# Altium PCB BMS_Slavee.PcbDoc (part 4 of 4)
Units mm, origin at the board's own origin, x right, y up, seen from the top; angles counter-clockwise.
Board outline 197.87 x 123.44 mm, 2 copper layers (Top Layer, Bottom Layer); 344 components, 178 nets, 953 pads, 755 vias.
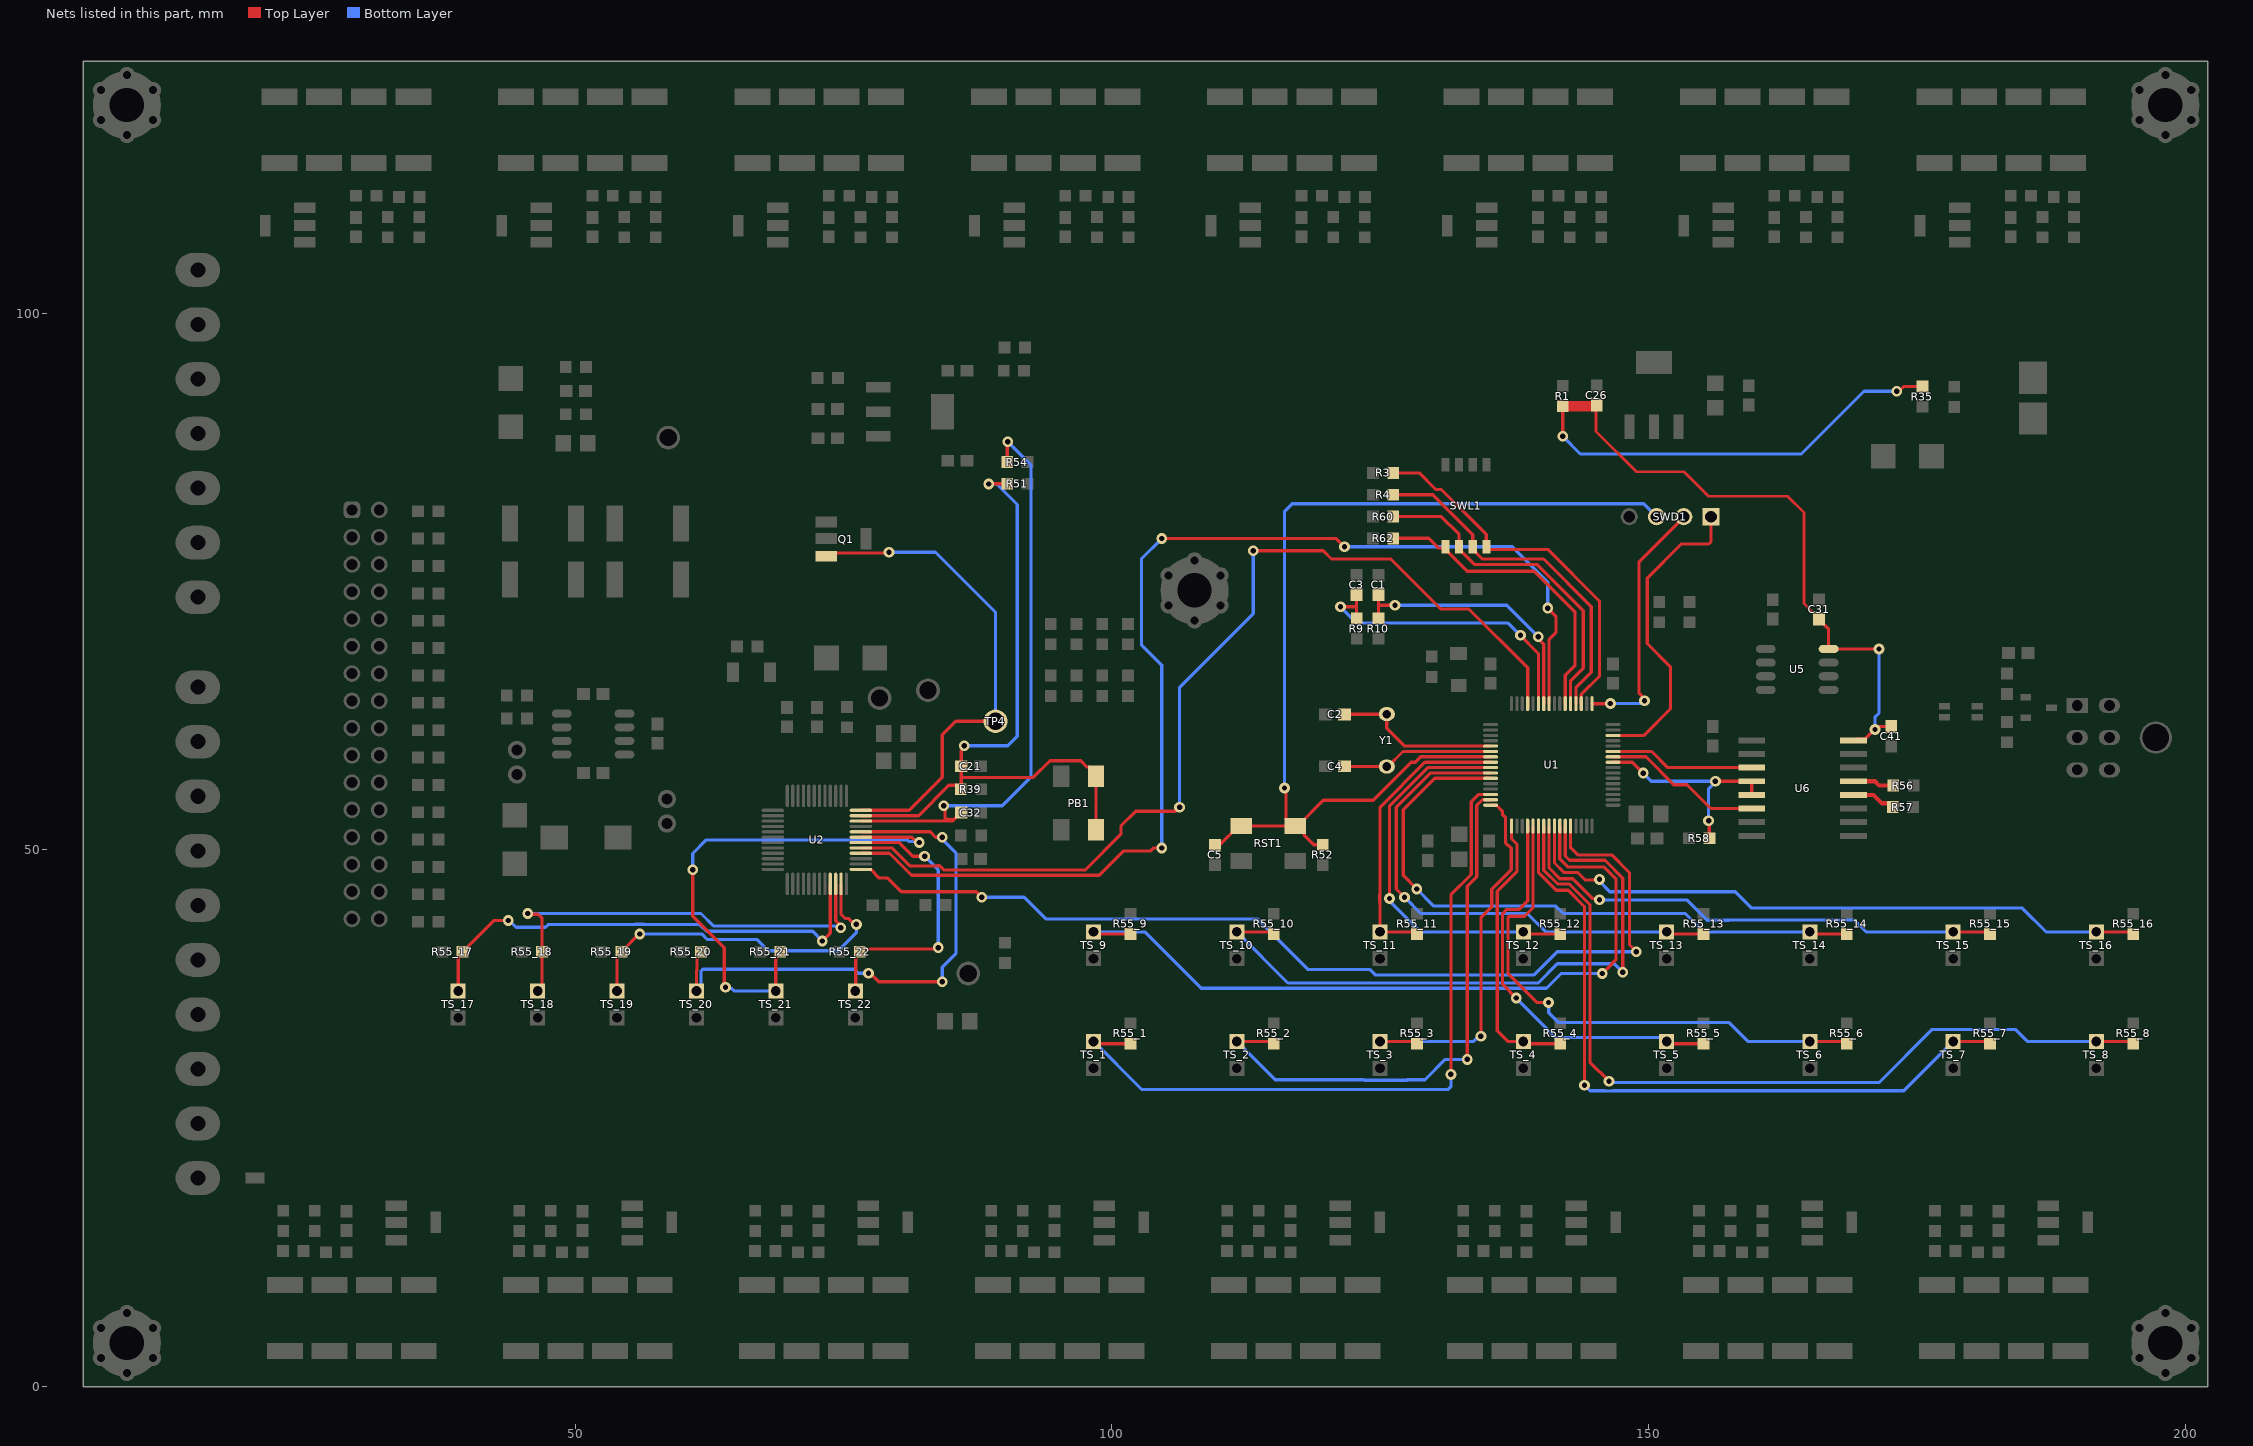
[diagram p4: the nets of this part, all layers, seen from the top]

## Via types
v1: diameter 1, hole 0.5, Top Layer to Bottom Layer, tented both sides, 697 vias
v2: diameter 2, hole 1, Top Layer to Bottom Layer, tented both sides, 58 vias

## Nets (pads, with @x,y where several pads share a name; then routed paths per layer and width w, separated by ;. In a path a pad name is that pad's centre, name@x,y a point inside that pad or via, vN(x,y) a via of type N, cw(c..) or ccw(c..) an arc to the next point about the centre after c; other vN are vias at no path point) (continued)
NetU1_28: U1.28 U2.25 | length 93.4
  Top Layer w0.3: U2.25@76.617,48.177 77.517,48.177 78.323,47.371 79.121,47.371 80.391,46.101 87.358,46.101 87.866,45.593 v1(87.884,45.593) ; U1.28@142.72,52.324 142.72,50.193 143.383,49.53 146.558,49.53 148.209,47.879 148.209,41.148 v1(148.844,40.513)
  Bottom Layer w0.3: v1(87.884,45.593) 91.821,45.593 93.853,43.561 113.538,43.561 118.237,38.862 124,38.862 124.508,38.354 139.319,38.354 141.478,40.513 v1(148.844,40.513)
NetU1_57: U1.57 U2.28 | length 109.9
  Top Layer w0.3: U2.28@76.617,49.677 79.283,49.677 81.327,47.633 98.829,47.633 101.092,49.896 101.204,49.896 103.609,49.896 103.893,50.18 104.633,50.18 v1(104.648,50.165) ; v1(104.648,78.994) 120.904,78.994 v1(121.666,78.232) ; v1(140.589,72.517) 141.351,71.755 141.351,70.231 140.72,69.6 U1.57@140.72,63.612
  Bottom Layer w0.3: v1(104.648,50.165) 104.648,67.183 102.743,69.088 102.743,77.089 v1(104.648,78.994) ; v1(121.666,78.232) 137.287,78.232 140.589,74.93 v1(140.589,72.517)
NetU1_61: U1.61 U2.29 | length 93.8
  Top Layer w0.3: U2.29@76.617,50.177 79.49,50.177 81.168,48.499 83.678,48.499 83.696,48.517 83.944,48.517 84.328,48.133 97.536,48.133 100.838,51.435 100.838,52.22 102.217,53.6 105.924,53.6 v1(106.299,53.975) ; v1(113.157,77.851) 119.688,77.851 120.45,77.089 125.984,77.089 130.647,72.426 133.259,72.426 138.72,66.965 U1.61@138.72,63.373
  Bottom Layer w0.3: v1(106.299,53.975) 106.299,65.151 113.157,72.009 v1(113.157,77.851)
NRST: C5.1 R52.1 RST1.1 SWD1.3 U1.7 | length 97.1
  Top Layer w0.3: C5.1@109.564,50.189 C5.1@109.855,50.48 ; C5.1@110.013,50.43 111.804,52.221 RST1.1@112.054,52.221 116.804,52.221 116.204,52.821 116.204,55.627 v1(116.078,55.753) ; RST1.1@117.054,52.221 RST1.1@117.304,52.221 ; R52.1@119.634,50.48 118.795,50.48 117.904,51.371 117.904,51.621 RST1.1@117.304,52.221 ; U1.7@135.27,58.662 128.766,58.662 128.27,58.166 127.889,58.166 124.333,54.61 119.693,54.61 RST1.1@117.304,52.221
  Bottom Layer w0.3: v1(116.078,55.753) 116.078,81.534 116.777,82.233 149.519,82.233 SWD1.3@150.723,81.029
PH0-OSC_IN: C2.2 U1.5 Y1.1 | length 15.7
  Top Layer w0.3: C2.2@121.677,62.992 122.031,62.638 Y1.1@125.603,62.638 125.603,61.341 127.282,59.662 U1.5@135.27,59.662
PH1-OSC_OUT: C4.2 U1.6 Y1.2 | length 14.2
  Top Layer w0.3: C4.2@121.677,57.785 121.704,57.758 Y1.2@125.603,57.758 125.703,57.758 127.107,59.162 U1.6@135.27,59.162
REG1: C21.1 PB1.2 R39.2 R51.2 U2.35 | length 65.8
  Top Layer w0.3: U2.35@76.617,53.177 81.989,53.177 84.819,56.007 85.562,56.007 R39.2@85.918,55.651 85.968,55.701 85.968,56.743 ; v1(86.233,59.69) 86.233,59.501 85.968,59.236 C21.1@85.968,57.785 85.968,56.743 ; v1(88.519,84.074) 88.646,84.074 88.664,84.092 R51.2@90.246,84.092 ; PB1.2@98.528,51.856 PB1.2@98.528,56.856 98.528,57.106 97.928,57.706 97.678,57.706 97.091,58.293 94.234,58.293 92.684,56.743 85.968,56.743
  Bottom Layer w0.3: v1(86.233,59.69) 90.297,59.69 91.186,60.579 91.186,82.169 89.281,84.074 v1(88.519,84.074)
REG2: C32.1 R54.2 U2.34 | length 55.1
  Top Layer w0.3: U2.34@76.617,52.677 85.128,52.677 C32.1@85.918,53.467 ; v1(84.328,54.102) 84.455,53.975 84.455,52.839 84.707,52.839 84.709,52.837 85.288,52.837 ; R54.2@90.246,86.124 90.246,87.96 v1(90.297,88.011)
  Bottom Layer w0.3: v1(84.328,54.102) 89.789,54.102 92.456,56.769 92.456,85.852 v1(90.297,88.011)
REGIN: Q1.3 TP4.1 U2.36 | length 46.7
  Top Layer w0.3: Q1.3@73.409,77.334 73.719,77.644 79.161,77.644 v1(79.24,77.723) ; U2.36@76.617,53.677 81.109,53.677 84.201,56.769 84.201,60.706 85.471,61.976 TP4.1@89.154,61.976 ; v1@79.24,77.644 v1@79.248,77.644
  Bottom Layer w0.3: v1(79.24,77.723) v1(79.24,77.723) 83.566,77.724 89.154,72.136 TP4.1@89.154,61.976
RS_TR_EN: R58.1 U1.41 U6.4 U6.5 | length 19.9
  Top Layer w0.3: U1.41@146.67,58.162 148.467,58.162 v1(149.479,57.15) ; v1(155.575,52.705) 155.646,52.634 R58.1@155.646,51.072 ; v1(156.21,56.388) U6.4@158.969,56.388 ; U6.5@159.604,55.118 U6.4@159.604,56.388
  Bottom Layer w0.3: v1(149.479,57.15) 150.241,56.388 v1(156.21,56.388) 156.21,56.315 155.575,55.68 v1(155.575,52.705)
RSIN_N: R56.1 U6.13 | length 3.9
  Top Layer w0.381: U6.13@169.072,56.388 171.069,56.388 171.468,55.989 R56.1@172.776,55.989
RSIN_P: R57.2 U6.12 | length 4.1
  Top Layer w0.381: U6.12@169.072,55.118 170.942,55.118 171.725,54.335 172.36,54.335 R57.2@172.72,53.975
SCL: C1.1 R10.1 U1.58 | length 24.8
  Top Layer w0.3: R10.1@124.816,71.562 124.841,71.587 124.841,72.682 ; C1.1@124.841,73.776 124.841,72.682 ; v1(126.365,72.771) 124.93,72.771 124.841,72.682 ; v1(139.7,69.85) 139.7,69.661 140.22,69.141 U1.58@140.22,63.612
  Bottom Layer w0.3: v1(126.365,72.771) 136.779,72.771 v1(139.7,69.85)
SDA: C3.1 R9.1 U1.59 | length 28.7
  Top Layer w0.3: v1(121.285,72.644) 122.746,72.644 122.784,72.682 ; C3.1@122.784,73.776 122.784,72.682 ; R9.1@122.809,71.562 122.784,71.587 122.784,72.682 ; v1(138.049,69.977) 138.793,69.233 138.793,69.218 139.72,68.29 U1.59@139.72,63.612
  Bottom Layer w0.3: v1(121.285,72.644) 122.806,71.123 136.903,71.123 v1(138.049,69.977)
SW1: R62.1 SWL1.5 U1.54 | length 28.8
  Top Layer w0.3: R62.1@126.207,79.012 129.522,79.012 130.429,78.105 SWL1.5@130.937,78.105 ; SWL1.5@131.064,78.232 131.064,78.105 131.064,77.978 133.096,75.946 139.319,75.946 143.137,72.128 143.137,67.191 142.22,66.274 U1.54@142.22,63.612
SW2: R60.1 SWL1.6 U1.53 | length 31.6
  Top Layer w0.3: R60.1@125.928,81.044 130.665,81.044 132.334,79.375 SWL1.6@132.334,78.232 132.334,77.978 133.731,76.581 139.573,76.581 143.891,72.263 143.891,66.929 142.72,65.758 U1.53@142.72,63.612
SW3: R4.1 SWL1.7 U1.52 | length 33.5
  Top Layer w0.3: R4.1@125.928,83.076 129.894,83.076 133.604,79.366 SWL1.7@133.604,78.232 133.604,77.978 134.493,77.089 140.208,77.089 144.653,72.644 144.653,66.548 143.22,65.115 U1.52@143.22,63.612
SW4: R3.1 SWL1.8 U1.51 | length 35.4
  Top Layer w0.3: R3.1@125.928,85.108 128.633,85.108 130.175,83.566 130.683,83.566 134.874,79.375 134.874,78.209 135.105,77.978 140.589,77.978 145.415,73.152 145.415,66.167 143.72,64.472 U1.51@143.72,63.612
SWCLK: SWD1.2 U1.49 | length 24.1
  Top Layer w0.3: U1.49@144.72,63.612 146.416,63.612 v1(146.431,63.627) ; v1(149.606,63.881) 149.606,64.07 149.098,64.578 149.098,76.835 SWD1.2@153.289,81.026
  Bottom Layer w0.3: v1(146.431,63.627) 149.352,63.627 v1(149.606,63.881)
SWDIO: SWD1.1 U1.46 | length 29.1
  Top Layer w0.3: U1.46@146.67,60.662 149.562,60.662 152.019,63.119 152.019,67.056 149.86,69.215 149.86,75.311 153.035,78.486 155.575,78.486 155.803,78.714 SWD1.1@155.803,81.029
TS_1: R55_1.1 TS_1.1 U1.14 | length 68.2
  Top Layer w0.3: TS_1.1@98.287,32.151 98.495,31.943 R55_1.1@101.727,31.943 ; v1(131.572,29.083) 131.572,45.801 133.477,47.706 133.477,54.483 134.156,55.162 U1.14@135.27,55.162
  Bottom Layer w0.3: TS_1.1@98.287,32.151 102.752,27.686 102.989,27.686 103.004,27.671 103.752,27.671 103.767,27.686 131.318,27.686 131.572,27.94 v1(131.572,29.083)
TS_2: R55_2.1 TS_2.1 U1.15 | length 52.8
  Top Layer w0.3: TS_2.1@111.631,32.151 114.863,32.151 R55_2.1@115.071,31.943 ; v1(133.096,30.48) 133.096,46.617 133.985,47.506 133.985,54.134 134.513,54.662 U1.15@135.27,54.662
  Bottom Layer w0.3: TS_2.1@111.631,32.151 115.207,28.575 123.486,28.575 123.514,28.547 127.48,28.547 127.508,28.575 129.159,28.575 131.064,30.48 v1(133.096,30.48)
TS_3: R55_3.1 TS_3.1 U1.16 | length 37.2
  Top Layer w0.3: TS_3.1@124.975,32.151 128.207,32.151 R55_3.1@128.415,31.943 R55_3.1@128.608,31.75 ; v1(134.366,32.639) 134.366,43.688 135.382,44.704 135.382,46.347 137.187,48.152 137.187,50.138 136.652,50.673 136.652,53.03 136.37,53.312 136.37,53.612 135.82,54.162 U1.16@135.27,54.162
  Bottom Layer w0.3: TS_3.1@124.975,32.151 133.689,32.151 134.177,32.639 v1(134.366,32.639)
TS_4: R55_4.1 TS_4.1 U1.17 | length 26.4
  Top Layer w0.3: U1.17@137.22,52.212 137.22,51.046 137.72,50.546 137.72,47.977 135.897,46.154 135.897,44.656 135.882,44.641 135.882,33.155 136.886,32.151 TS_4.1@138.319,32.151 138.527,31.943 R55_4.1@141.759,31.943
TS_5: R55_5.1 TS_5.1 U1.20 | length 37.4
  Top Layer w0.3: v1(137.668,36.195) 136.382,37.481 136.382,44.053 136.779,44.45 137.922,44.45 138.72,45.248 U1.20@138.72,52.212 ; TS_5.1@151.662,32.151 151.87,31.943 R55_5.1@155.103,31.943
  Bottom Layer w0.3: v1(137.668,36.195) 141.351,32.512 151.301,32.512 TS_5.1@151.662,32.151
TS_6: R55_6.1 TS_6.1 U1.21 | length 50.3
  Top Layer w0.3: U1.21@139.22,52.212 139.22,44.605 138.43,43.815 137.033,43.815 136.882,43.664 136.882,38.505 139.612,35.775 v1(140.666,35.775) ; TS_6.1@165.006,32.151 168.238,32.151 R55_6.1@168.447,31.943
  Bottom Layer w0.3: v1(140.666,35.775) 140.689,35.752 140.689,34.825 141.605,33.909 157.48,33.909 159.238,32.151 TS_6.1@165.006,32.151
TS_7: R55_7.1 TS_7.1 U1.22 | length 66.6
  Top Layer w0.3: U1.22@139.72,52.212 139.72,47.897 141.389,46.228 142.494,46.228 144.018,44.704 v1(144.018,28.067) ; TS_7.1@178.35,32.151 181.582,32.151 R55_7.1@181.79,31.943
  Bottom Layer w0.3: v1(144.018,28.067) 144.526,27.559 145.915,27.559 145.93,27.544 146.678,27.544 146.693,27.559 173.758,27.559 TS_7.1@178.35,32.151
TS_8: R55_8.1 TS_8.1 U1.23 | length 78.4
  Top Layer w0.3: U1.23@140.22,52.212 140.22,48.104 141.507,46.816 142.613,46.816 144.518,44.911 144.518,30.234 v1(146.304,28.448) ; TS_8.1@191.694,32.151 194.926,32.151 R55_8.1@195.134,31.943
  Bottom Layer w0.3: v1(146.304,28.448) 146.431,28.321 171.45,28.321 176.403,33.274 182.872,33.274 182.887,33.259 183.635,33.259 183.65,33.274 184.15,33.274 185.273,32.151 TS_8.1@191.694,32.151
TS_9: R55_9.1 TS_9.1 U1.26 | length 72
  Top Layer w0.3: TS_9.1@98.287,42.359 98.495,42.151 R55_9.1@101.727,42.151 ; U1.26@141.72,52.212 141.72,49.161 142.486,48.395 145.843,48.395 146.939,47.299 146.939,39.759 146.41,39.231 146.41,39.222 v1(145.669,38.481)
  Bottom Layer w0.3: TS_9.1@98.287,42.359 103.056,42.359 108.316,37.099 140.477,37.099 141.859,38.481 v1(145.669,38.481)
TS_10: R55_10.1 TS_10.1 U1.27 | length 60.3
  Top Layer w0.3: TS_10.1@111.631,42.359 114.863,42.359 R55_10.1@115.071,42.151 ; U1.27@142.22,52.212 142.22,49.423 142.621,49.022 145.923,49.022 147.574,47.371 v1(147.574,38.608)
  Bottom Layer w0.3: TS_10.1@111.631,42.359 116.391,37.599 139.707,37.599 141.493,39.385 146.797,39.385 v1(147.574,38.608)
TS_11: R55_11.1 TS_11.1 U1.8 | length 27.2
  Top Layer w0.3: R55_11.1@128.415,42.151 128.207,42.359 TS_11.1@124.975,42.359 124.975,45.07 124.953,45.092 124.953,45.84 124.975,45.862 124.975,53.982 129.155,58.162 U1.8@135.27,58.162
TS_12: R55_12.1 TS_12.1 U1.9 | length 36.9
  Top Layer w0.3: v1(125.857,45.466) 125.857,54.102 129.417,57.662 U1.9@135.27,57.662 ; TS_12.1@138.319,42.359 138.527,42.151 R55_12.1@141.759,42.151
  Bottom Layer w0.3: v1(125.857,45.466) 125.857,45.212 128.71,42.359 TS_12.1@138.319,42.359
TS_13: R55_13.1 TS_13.1 U1.10 | length 48.1
  Top Layer w0.3: v1(127.254,45.593) 126.492,46.355 126.492,53.975 129.679,57.162 U1.10@135.27,57.162 ; TS_13.1@151.662,42.359 151.87,42.151 R55_13.1@155.103,42.151
  Bottom Layer w0.3: v1(127.254,45.593) 128.778,44.069 138.684,44.069 140.394,42.359 TS_13.1@151.662,42.359
TS_14: R55_14.1 TS_14.1 U1.11 | length 59
  Top Layer w0.3: v1(128.397,46.355) 127.127,47.625 127.127,53.721 130.068,56.662 U1.11@135.27,56.662 ; TS_14.1@165.006,42.359 165.214,42.151 R55_14.1@168.447,42.151
  Bottom Layer w0.3: v1(128.397,46.355) 129.99,44.762 141.357,44.762 142.049,44.069 153.416,44.069 155.126,42.359 TS_14.1@165.006,42.359
TS_15: R55_15.1 TS_15.1 U1.24 | length 47.5
  Top Layer w0.3: U1.24@140.72,52.212 140.72,48.311 141.715,47.316 142.93,47.316 144.789,45.457 145.297,45.457 v1(145.415,45.339) ; TS_15.1@178.35,42.359 181.582,42.359 R55_15.1@181.79,42.151
  Bottom Layer w0.3: v1(145.415,45.339) 153.543,45.339 155.448,43.434 157.48,43.434 157.509,43.463 169.135,43.463 170.239,42.359 TS_15.1@178.35,42.359
TS_16: R55_16.1 TS_16.1 U1.25 | length 60.2
  Top Layer w0.3: U1.25@141.22,52.212 141.22,48.772 142.097,47.895 143.367,47.895 144.061,47.201 145.372,47.201 v1(145.415,47.244) ; TS_16.1@191.694,42.359 194.926,42.359 R55_16.1@195.134,42.151
  Bottom Layer w0.3: v1(145.415,47.244) 145.415,47.063 146.377,46.101 158.051,46.101 159.575,44.577 184.785,44.577 187.003,42.359 TS_16.1@191.694,42.359
TS_17: R55_17.1 TS_17.1 U2.21 | length 45.2
  Top Layer w0.3: TS_17.1@39.105,36.85 39.105,40.098 42.42,43.413 v1(43.777,43.413) ; v1(73.025,41.505) 73.767,42.247 U2.21@73.767,46.827
  Bottom Layer w0.3: v1(43.777,43.413) 43.862,43.413 44.491,42.784 47.237,42.784 47.491,43.038 55.603,43.038 55.633,43.068 56.381,43.068 56.411,43.038 61.61,43.038 62.238,42.41 72.12,42.41 v1(73.025,41.505)
TS_18: R55_18.1 TS_18.1 U2.22 | length 42.4
  Top Layer w0.3: v1(45.593,44.069) 45.654,44.008 46.543,44.008 46.918,43.633 R55_18.1@46.918,40.513 46.918,37.265 TS_18.1@46.502,36.85 ; U2.22@74.267,46.827 74.267,43.389 74.735,42.921 v1(74.735,42.731)
  Bottom Layer w0.3: v1(45.593,44.069) 61.722,44.069 62.881,42.91 74.21,42.91 74.254,42.865 74.601,42.865 v1(74.735,42.731)
TS_19: R55_19.1 TS_19.1 U2.23 | length 33.2
  Top Layer w0.3: TS_19.1@53.9,36.85 53.9,40.098 R55_19.1@54.315,40.513 55.966,42.164 v1(56.007,42.164) ; U2.23@74.767,46.827 74.767,43.978 75.134,43.611 75.452,43.611 76.011,43.053 v1(76.2,43.053)
  Bottom Layer w0.3: v1(56.007,42.164) 61.777,42.164 62.285,41.656 66.929,41.656 67.984,40.601 74.51,40.601 76.2,42.291 v1(76.2,43.053)
TS_20: R55_20.1 TS_20.1 U2.32 | length 51.2
  Top Layer w0.3: TS_20.1@61.298,36.85 61.298,38.733 61.345,38.78 61.345,40.146 R55_20.1@61.713,40.513 ; U2.32@76.617,51.677 83.07,51.677 83.566,51.181 v1(84.201,51.181) ; v1(77.328,38.501) 77.493,38.501 78.275,37.719 v1(84.201,37.719)
  Bottom Layer w0.3: TS_20.1@61.298,36.85 61.722,37.274 61.722,38.701 61.898,38.877 75.994,38.877 76.37,38.501 v1(77.328,38.501) ; v1(84.201,37.719) 84.201,39.069 85.471,40.339 85.471,49.722 84.201,50.992 v1(84.201,51.181)
TS_21: R55_21.1 TS_21.1 U2.31 | length 49.7
  Top Layer w0.3: v1(60.96,48.133) 60.96,43.815 63.881,40.894 63.881,37.338 v1(64.008,37.211) ; TS_21.1@68.695,36.85 68.695,40.098 R55_21.1@69.11,40.513 ; U2.31@76.617,51.177 81.362,51.177 81.851,50.688 v1(82.041,50.688)
  Bottom Layer w0.3: v1(60.96,48.133) 60.96,49.657 62.23,50.927 80.941,50.927 81.091,50.777 81.952,50.777 v1(82.041,50.688) ; v1(64.008,37.211) 64.142,37.077 64.585,37.077 64.812,36.85 TS_21.1@68.695,36.85
TS_22: R55_22.1 TS_22.1 U2.30 | length 26.9
  Top Layer w0.3: TS_22.1@76.093,36.85 76.135,36.892 76.135,40.14 76.747,40.752 83.294,40.752 83.302,40.76 83.686,40.76 v1(83.82,40.894) ; U2.30@76.617,50.677 80.187,50.677 81.461,49.403 v1(82.55,49.403)
  Bottom Layer w0.3: v1@82.405,49.403 v1(82.55,49.403) 83.82,48.133 v1(83.82,40.894)
USART1_RX: U1.43 U6.3 | length 13.6
  Top Layer w0.3: U1.43@146.67,59.162 150.261,59.162 151.765,57.658 U6.3@159.604,57.658
USART1_TX: U1.42 U6.6 | length 14.9
  Top Layer w0.3: U1.42@146.67,58.662 149.745,58.662 152.336,56.071 153.564,56.071 155.786,53.848 U6.6@159.604,53.848
VCC-CAN: C26.2 C31.2 C41.2 R1.2 R35.1 U5.8 U6.16 | length 97.6
  Top Layer w0.254: C26.2@145.095,91.313 145.095,88.966 148.844,85.217 153.289,85.217 155.575,82.931 162.941,82.931 164.465,81.407 164.465,72.937 165.862,71.54 C31.2@165.862,71.49 ; v1(173.101,92.71) 173.303,92.71 173.755,93.162 R35.1@175.496,93.162
  Top Layer w0.3: v1(141.986,88.519) R1.2@141.986,91.313 ; C31.2@165.862,71.44 166.751,70.551 166.751,68.711 U5.8@166.755,68.707 v1(171.45,68.707) ; U6.16@169.072,60.198 169.289,60.198 169.418,60.327 170.164,60.327 171.322,61.485 C41.2@172.593,61.485
  Top Layer w1: R1.2@141.986,91.313 C26.2@145.095,91.313
  Bottom Layer w0.3: v1(141.986,88.519) 143.637,86.868 164.211,86.868 170.053,92.71 v1(173.101,92.71) ; v1(171.069,61.214) 171.069,62.357 171.45,62.738 v1(171.45,68.707)
pads on no net: H1.0 J1.0 U1.30 U1.33 U1.34 U1.35 U1.36 U1.37 U1.38 U1.39 U1.40 U1.50 U2.19 U2.38 U2.39 U2.40 U2.43 U2.44 U2.45 U3.4 U4.4 U6.11 U6.14

## Polygon pours and split planes (outlines as drawn)
GND on Bottom Layer "GND_L02_P002" (solid, remove dead copper, pour order 2): 18.434,101.981 201.549,101.981 201.549,25.527 18.903,25.527
+Cell_5 on Bottom Layer "+CELL_5_L02_P042" (solid, remove dead copper, pour order 42): 106.339,10.287 106.339,25.654 126.786,25.654 126.786,10.287
+Cell_4 on Bottom Layer "+CELL_4_L02_P041" (solid, remove dead copper, pour order 41): 84.358,10.287 84.358,25.781 104.805,25.781 104.805,10.287
+Cell_3 on Bottom Layer "+CELL_3_L02_P040" (solid, remove dead copper, pour order 40): 62.377,10.287 62.377,25.527 82.824,25.527 82.824,10.287
+Cell_2 on Bottom Layer "+CELL_2_L02_P039" (solid, remove dead copper, pour order 39): 40.396,10.287 40.396,25.781 60.843,25.781 60.843,10.287
+Cell_8 on Bottom Layer "+CELL_8_L02_P045" (solid, remove dead copper, pour order 45): 172.282,10.287 172.282,25.654 192.729,25.654 192.729,10.287
+Cell_1 on Bottom Layer "+CELL_1_L02_P038" (solid, remove dead copper, pour order 38): 18.415,10.287 18.415,25.781 38.862,25.781 38.862,10.287
+Cell_13 on Bottom Layer "+CELL_13_L02_P049" (solid, remove dead copper, pour order 49): 85.344,113.157 85.344,102.87 105.791,102.87 105.791,113.157
+Cell_10 on Bottom Layer "+CELL_10_L02_P052" (solid, remove dead copper, pour order 52): 151.384,113.157 151.384,102.87 171.831,102.87 171.831,113.157
+Cell_7 on Bottom Layer "+CELL_7_L02_P044" (solid, remove dead copper, pour order 44): 150.301,10.287 150.301,25.654 170.748,25.654 170.748,10.287
+Cell_9 on Bottom Layer "+CELL_9_L02_P053" (solid, remove dead copper, pour order 53): 173.482,113.157 173.482,102.87 193.929,102.87 193.929,113.157
+Cell_11 on Bottom Layer "+CELL_11_L02_P051" (solid, remove dead copper, pour order 51): 129.413,113.157 129.413,102.87 149.86,102.87 149.86,113.157
+Cell_12 on Bottom Layer "+CELL_12_L02_P050" (solid, remove dead copper, pour order 50): 107.442,113.157 107.442,102.87 127.889,102.87 127.889,113.157
+Cell_14 on Bottom Layer "+CELL_14_L02_P048" (solid, remove dead copper, pour order 48): 63.373,113.157 63.373,102.87 83.82,102.87 83.82,113.157
+Cell_15 on Bottom Layer "+CELL_15_L02_P047" (solid, remove dead copper, pour order 47): 41.275,113.157 41.275,102.87 61.722,102.87 61.722,113.157
+Cell_16 on Bottom Layer "+CELL_16_L02_P046" (solid, remove dead copper, pour order 46): 19.304,113.157 19.304,102.87 39.751,102.87 39.751,113.157
+Cell_6 on Bottom Layer "+CELL_6_L02_P043" (solid, remove dead copper, pour order 43): 128.32,10.287 128.32,26.416 148.767,26.416 148.767,10.287
GND on Top Layer "GND_L01_P000" (solid, remove dead copper, pour order 0): 18.415,105.029 201.549,105.029 201.549,19.558 18.923,19.558 18.923,22.225

## Keep-outs
Keep-Out Layer:
  the board outline again, w0.254

## Other copper
Top Layer:
  region net NetQ2_14_2: 83.533,122.555 62.197,122.555 62.197,117.602 83.533,117.602
  region net +Cell_14: 83.533,116.967 62.197,116.967 62.197,112.014 83.533,112.014
  region net NetQ2_13_2: 105.551,122.555 84.215,122.555 84.215,117.602 105.551,117.602
  region net +Cell_13: 105.551,116.967 84.215,116.967 84.215,112.014 105.551,112.014
  region net NetQ2_12_2: 127.569,122.555 106.233,122.555 106.233,117.602 127.569,117.602
  region net +Cell_12: 127.569,116.967 106.233,116.967 106.233,112.014 127.569,112.014
  region net NetQ2_11_2: 149.587,122.555 128.251,122.555 128.251,117.602 149.587,117.602
  region net +Cell_11: 149.587,116.967 128.251,116.967 128.251,112.014 149.587,112.014
  region net NetQ2_10_2: 171.605,122.555 150.269,122.555 150.269,117.602 171.605,117.602
  region net +Cell_10: 171.605,116.967 150.269,116.967 150.269,112.014 171.605,112.014
  region net NetQ2_9_2: 193.623,122.555 172.287,122.555 172.287,117.602 193.623,117.602
  region net +Cell_9: 193.623,116.967 172.287,116.967 172.287,112.014 193.623,112.014
  region net NetQ2_15_2: 61.515,122.555 40.179,122.555 40.179,117.602 61.515,117.602
  region net +Cell_15: 61.515,116.967 40.179,116.967 40.179,112.014 61.515,112.014
  rectangle net +Cell_8: 172.282,6.477 193.618,11.43
  rectangle net NetQ2_8_2: 172.282,0.889 193.618,5.842
  rectangle net +Cell_7: 150.301,6.477 171.637,11.43
  rectangle net NetQ2_7_2: 150.301,0.889 171.637,5.842
  rectangle net +Cell_6: 128.32,6.477 149.656,11.43
  rectangle net NetQ2_6_2: 128.32,0.889 149.656,5.842
  rectangle net +Cell_5: 106.339,6.477 127.675,11.43
  rectangle net NetQ2_5_2: 106.339,0.889 127.675,5.842
  rectangle net +Cell_4: 84.358,6.477 105.694,11.43
  rectangle net NetQ2_4_2: 84.358,0.889 105.694,5.842
  rectangle net +Cell_3: 62.377,6.477 83.713,11.43
  rectangle net NetQ2_3_2: 62.377,0.889 83.713,5.842
  rectangle net +Cell_2: 40.396,6.477 61.732,11.43
  rectangle net NetQ2_2_2: 40.396,0.889 61.732,5.842
  rectangle net +Cell_1: 18.415,6.477 39.751,11.43
  region net +Cell_16: 39.497,116.967 18.161,116.967 18.161,112.014 39.497,112.014
  region net NetQ2_16_2: 39.497,122.555 18.161,122.555 18.161,117.602 39.497,117.602
  rectangle net NetQ2_1_2: 18.415,0.889 39.751,5.842
  pour cut-out: 163.576,47.752 201.422,47.752 201.422,97.536 139.954,97.536 139.954,82.931 163.576,82.931 163.576,80.772
Bottom Layer:
  rectangle net +Cell_14: 63.34,112.014 83.533,116.967
  rectangle net NetQ2_14_2: 62.197,117.602 83.533,122.555
  rectangle net +Cell_13: 85.358,112.014 105.551,116.967
  rectangle net NetQ2_13_2: 84.215,117.602 105.551,122.555
  rectangle net +Cell_12: 107.376,112.014 127.569,116.967
  rectangle net NetQ2_12_2: 106.233,117.602 127.569,122.555
  rectangle net +Cell_11: 129.394,112.014 149.587,116.967
  rectangle net NetQ2_11_2: 128.251,117.602 149.587,122.555
  rectangle net +Cell_10: 151.412,112.014 171.605,116.967
  rectangle net NetQ2_10_2: 150.269,117.602 171.605,122.555
  rectangle net +Cell_9: 173.43,112.014 193.623,116.967
  rectangle net NetQ2_9_2: 172.287,117.602 193.623,122.555
  rectangle net +Cell_15: 41.322,112.014 61.515,116.967
  rectangle net NetQ2_15_2: 40.179,117.602 61.515,122.555
  rectangle net NetQ2_8_2: 172.282,0.889 193.618,5.842
  rectangle net +Cell_8: 172.282,6.477 192.348,11.43
  rectangle net NetQ2_7_2: 150.301,0.889 171.637,5.842
  rectangle net +Cell_7: 150.301,6.477 170.367,11.43
  rectangle net NetQ2_6_2: 128.32,0.889 149.656,5.842
  rectangle net +Cell_6: 128.32,6.477 148.386,11.43
  rectangle net NetQ2_5_2: 106.339,0.889 127.675,5.842
  rectangle net +Cell_5: 106.339,6.477 126.405,11.43
  rectangle net NetQ2_4_2: 84.358,0.889 105.694,5.842
  rectangle net +Cell_4: 84.358,6.477 104.424,11.43
  rectangle net NetQ2_3_2: 62.377,0.889 83.713,5.842
  rectangle net +Cell_3: 62.377,6.477 82.443,11.43
  rectangle net NetQ2_2_2: 40.396,0.889 61.732,5.842
  rectangle net +Cell_2: 40.396,6.477 60.462,11.43
  rectangle net +Cell_1: 18.415,6.477 38.481,11.43
  rectangle net +Cell_16: 19.304,112.014 39.497,116.967
  rectangle net NetQ2_16_2: 18.161,117.602 39.497,122.555
  rectangle net NetQ2_1_2: 18.415,0.889 39.751,5.842
  pour cut-out: 163.576,47.752 201.422,47.752 201.422,97.536 139.954,97.536 139.954,82.931 163.576,82.931 163.576,80.772

## Silkscreen, mask and mechanical layers (free items; w line width, h text height)
Top Overlay:
  lines w0.1: 192.913,70.612 192.913,77.597 188.595,77.597 ; 188.595,77.597 188.595,70.612 197.866,70.612 197.866,77.597 188.595,77.597
  text "+" at 17.88,104.494 h0.8
  text "B16" at 18.388,100.938 h0.8
  text "B15" at 18.388,95.858 h0.8
  text "B14" at 18.388,90.778 h0.8
  text "B13" at 18.388,85.698 h0.8
  text "B12" at 18.388,80.618 h0.8
  text "12V" at 189.076,75.665 h1.2
  text "GND" at 193.902,75.665 h1.2
  text "B11" at 18.388,75.538 h0.8
  text "12V" at 188.949,73.569 h1.2
  text "GND" at 193.902,73.569 h1.2
  text "H" at 189.203,71.474 h1.2
  text "L" at 193.902,71.474 h1.2
  text "B10" at 18.388,68.553 h0.8
  text "B9" at 18.642,62.076 h0.8
  text "B8" at 18.642,56.996 h0.8
  text "B7" at 18.642,51.916 h0.8
  text "B6" at 18.642,46.836 h0.8
  text "B5" at 18.642,41.756 h0.8
  text "B4" at 18.642,36.676 h0.8
  text "B3" at 18.642,31.596 h0.8
  text "BMU_V0.3" at 28.194,26.702 h2
  text "B2" at 18.642,26.516 h0.8
  text "04.10.07" at 28.194,23.114 h2
  text "B1" at 18.642,21.436 h0.8
  text "-" at 18.642,16.394 h0.8

## Text inside footprints (layer, text, board x,y; h text height)
J1: Top Overlay "1" at 26.67,42.926 h1.91; Top Overlay "2" at 26.543,45.466 h1.91; Top Overlay "3" at 26.543,48.006 h1.91; Top Overlay "4" at 26.543,50.546 h1.91; Top Overlay "5" at 26.543,53.467 h1.91; Top Overlay "6" at 26.543,55.626 h1.91; Top Overlay "7" at 26.543,58.166 h1.91; Top Overlay "8" at 26.543,60.706 h1.91; Top Overlay "9" at 26.543,63.246 h1.91; Top Overlay "10" at 25.654,65.786 h1.91; Top Overlay "11" at 25.654,68.191 h1.91; Top Overlay "12" at 25.654,70.731 h1.91; Top Overlay "13" at 25.654,73.271 h1.91; Top Overlay "14" at 25.654,75.811 h1.91; Top Overlay "15" at 25.654,78.351 h1.91; Top Overlay "16" at 25.654,80.891 h1.91
SWL1: Top Overlay "OFF" at 136.323,86.093 h1.27 r270; Top Overlay "ON" at 136.323,79.578 h1.27 r270
U6: Mechanical 13 "*" at 160.604,59.652 h1.27